# Altium PCB PCB1.PcbDoc (part 1 of 2)
Units mil, origin at the board's own origin, x right, y up, seen from the top; angles counter-clockwise.
Board outline 2145 x 1950 mil, 2 copper layers (Top Layer, Bottom Layer); 45 components, 40 nets, 204 pads, 256 vias.
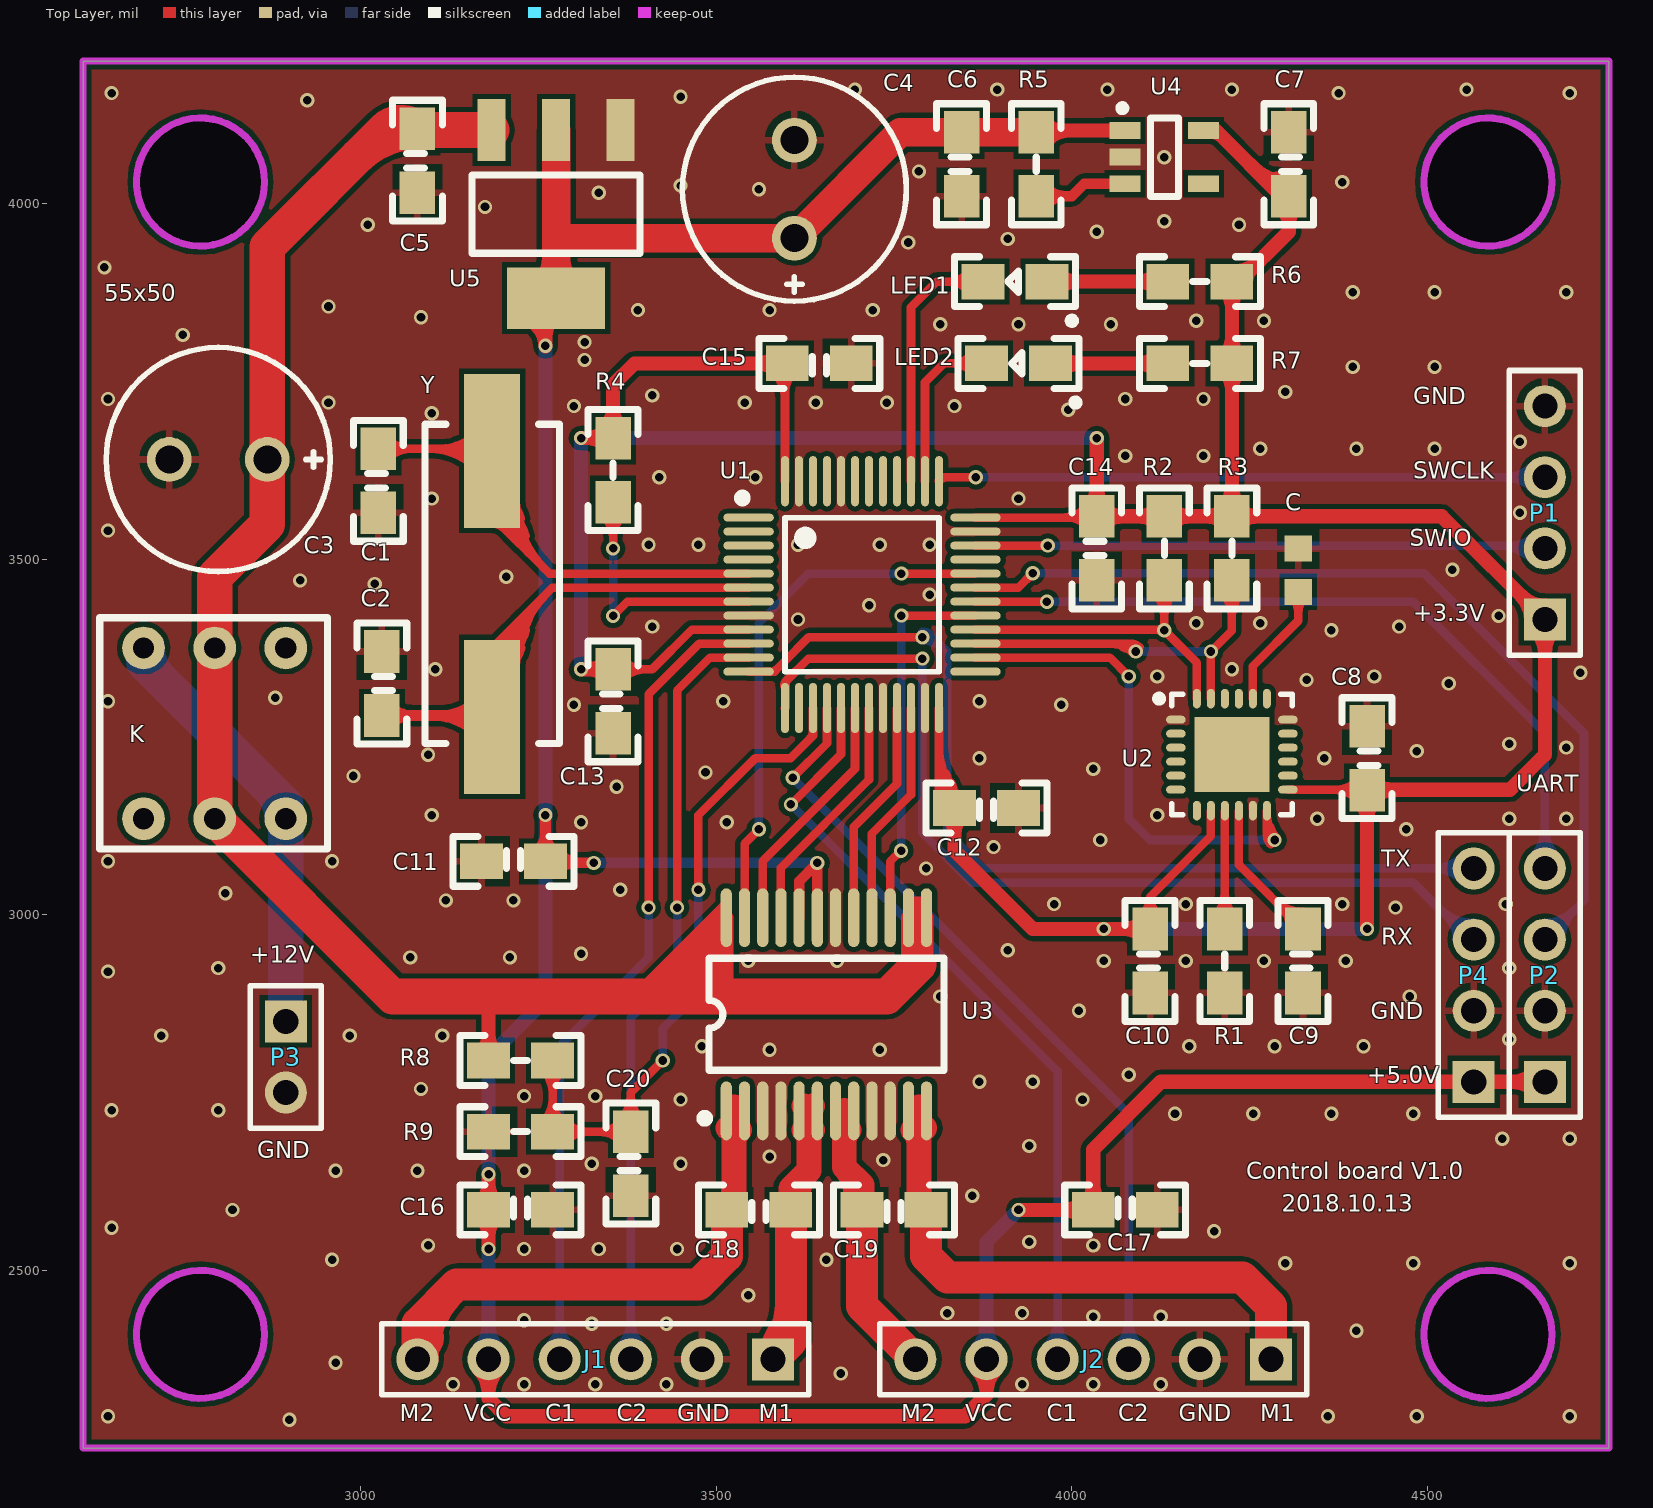
[diagram p0: Top Layer view]
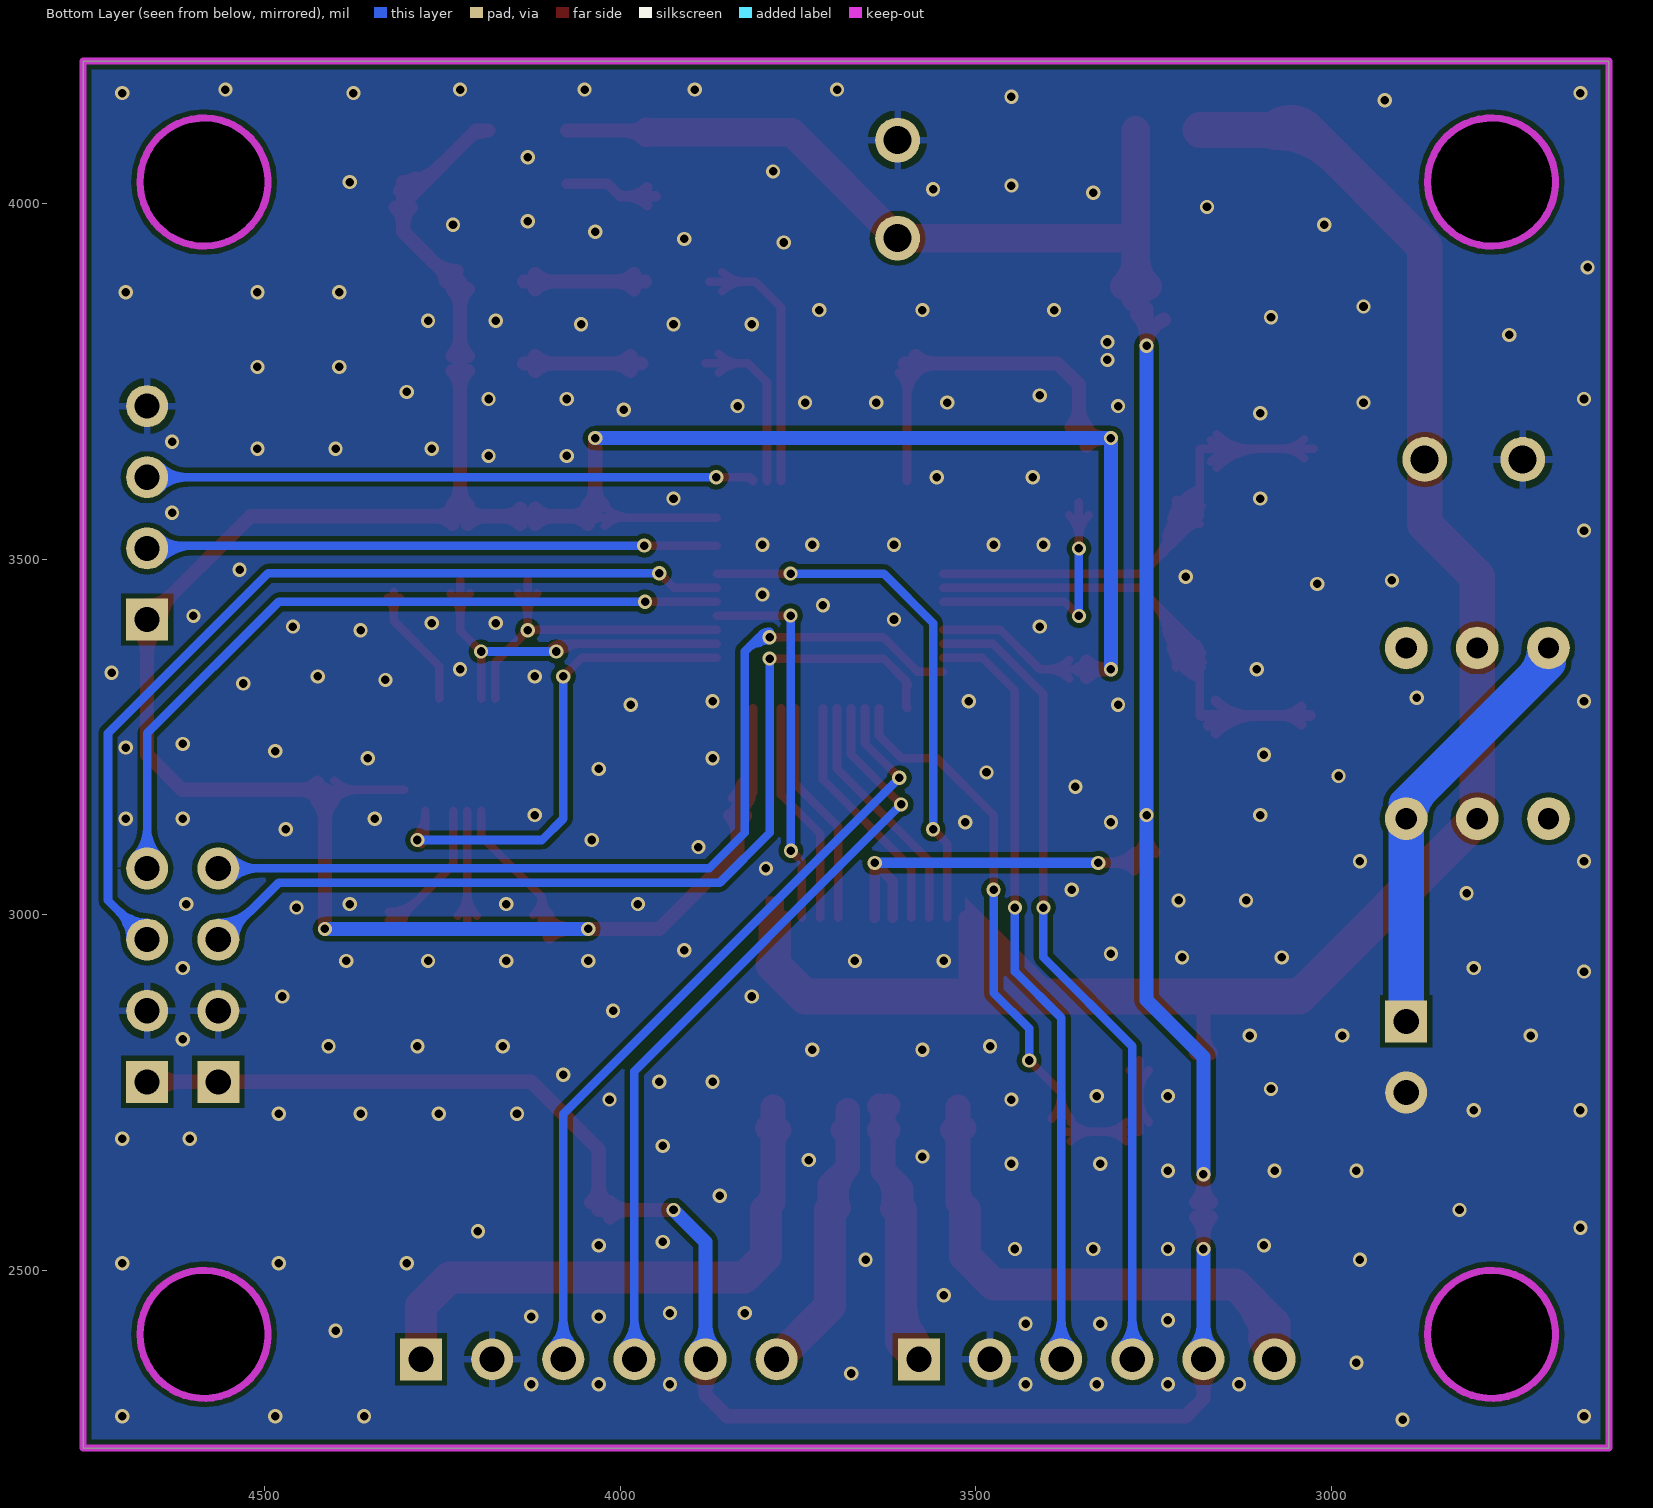
[diagram p1: Bottom Layer view, seen from below]

## Layer stack, top to bottom
Top Layer: signal copper 1.4
Dielectric: dielectric 12.6, FR-4, Dk 4.8
Bottom Layer: signal copper 1.4

## Board outline
2610,2250 2610,4200 4755,4200 4755,2250
cut-out: 4495,4030 ccw(c4585,4030) 4585,3940 ccw(c4585,4030) 4675,4030 ccw(c4585,4030) 4585,4120 ccw(c4585,4030)
cut-out: 2775,3940 cw(c2775,4030) 2685,4030 cw(c2775,4030) 2775,4120 cw(c2775,4030) 2865,4030 cw(c2775,4030)
cut-out: 2685,2410 ccw(c2775,2410) 2775,2320 ccw(c2775,2410) 2865,2410 ccw(c2775,2410) 2775,2500 ccw(c2775,2410)
cut-out: 4495,2410 ccw(c4585,2410) 4585,2320 ccw(c4585,2410) 4675,2410 ccw(c4585,2410) 4585,2500 ccw(c4585,2410)

## Design rules (kind name [scope] priority, off if disabled: settings)
Clearance [All] p1: gap=7
PlaneClearance [All] p1: clearance=40
PolygonConnect PolygonConnect_1 [IsVia] p1: connectstyle=Direct reliefconductorwidth=10 reliefentries=4 polygonreliefangle="90 Angle" airgapwidth=10
PolygonConnect [InComponent('U1','U2','U3','U4','U5','P3')] p2: connectstyle=Direct reliefconductorwidth=10 reliefentries=4 polygonreliefangle="90 Angle" airgapwidth=10
PolygonConnect PolygonConnect_2 [All] p3: connectstyle=Relief reliefconductorwidth=10 reliefentries=4 polygonreliefangle="90 Angle" airgapwidth=10
RoutingVias [All] p1: holewidth=28 width=50 viastyle="Through Hole" minholewidth=28 minwidth=50 maxholewidth=28 maxwidth=50
SolderMaskExpansion [All] p1: expansion=4
Width [All] p1: maxlimit=50 minlimit=12 preferedwidth=20 minimp=50.000000 maximp=50.000000 favimp=50.000000
27 further rules are at their usual default settings.

## Components (designator, comment, footprint, x,y, rotation, side; value= is the part's Value field where it differs from the comment)
C "2.2nf" 0603 4320,3485 r90 top
C1 "8.2pf" 0805-C 3025,3655 r270 top
C2 "8.2pf" 0805-C 3030,3280 r90 top
C3 "100U/50V" RB_D8_d3.5 2800,3640 r0 top
C4 "100U/50V" RB_D8_d3.5 3610,4020 r270 top
C5 "104" 0805-C 3080,4105 r270 top
C6 "104" 0805-C 3845,4100 r270 top
C7 "104" 0805-C 4305,4010 r90 top
C8 "104" 0805-C 4415,3175 r90 top
C9 "104" 0805-C 4325,2980 r270 top
C10 "104" 0805-C 4110,2980 r270 top
C11 "104" 0805-C 3260,3075 r180 top
C12 "104" 0805-C 3835,3150 r0 top
C13 "104" 0805-C 3355,3345 r270 top
C14 "104" 0805-C 4035,3560 r270 top
C15 "104" 0805-C 3600,3775 r0 top
C16 "104" 0805-C 3270,2585 r180 top
C17 "104" 0805-C 4120,2585 r180 top
C18 "104" 0805-C 3515,2585 r0 top
C19 "104" 0805-C 3705,2585 r0 top
C20 "104" 0805-C 3380,2695 r270 top
J1 "Header 6" HDR1X6 3580,2375 r180 top
J2 "Header 6" HDR1X6 4280,2375 r180 top
K "AN8*8" DIP-AN88 2795,3255 r270 top
LED1 "LED" LED-0805 3965,3890 r180 top
LED2 "LED" LED-0805 3970,3775 r180 top
P1 "HEADER4" HDR1X4 4665,3415 r90 top
P2 "HEADER4" HDR1X4 4665,2765 r90 top
P3 "Header2" HDR1X2 2895,2850 r270 top
P4 "HEADER4" HDR1X4 4565,2765 r90 top
R1 "10K" 0805-R 4215,2890 r90 top
R2 "10K" 0805-R 4130,3470 r90 top
R3 "10K" 0805-R 4225,3470 r90 top
R4 "10K" 0805-R 3355,3670 r270 top
R5 "10K" 0805-R 3950,4010 r90 top
R6 "100" 0805-R 4135,3890 r0 top
R7 "100" 0805-R 4135,3775 r0 top
R8 "100" 0805-R 3270,2795 r180 top
R9 "100" 0805-R 3180,2695 r0 top
U1 "STM32F103C8T6" LQFP-48 3705,3450 r270 top
U2 "MPU6050" QFN-24 4225,3225 r270 top
U3 "TB6612" SSOP-24 3655,2860 r0 top
U4 "RT9013" SOT-23-5 4130,4065 r180 top
U5 "AMS1117-5.0" SOT-223 3275,3985 r90 top
Y "8M" HC-49SMD 3185,3465 r90 top

## Footprints (in the part's own frame and the unit in brackets; to place one, negate y for a bottom-side part, rotate by r counter-clockwise, add the part's x,y. Pads: shape width x height; smd on the part's side, far side on the other; paste and mask are expansions set on the pad)
0603 [mm]
  rect 0.93x0.98 smd: 1(-0.789,0.042) 2(0.751,0.042)
0805-C [mil]
  rect 60x50 smd: 1(0,0) 2(90,0)
  silkscreen extent -40,-35 130,35
0805-R [mil]
  rect 60x50 smd: 1(0,0) 2(90,0)
  silkscreen extent -40,-35 130,35
DIP-AN88 [mil]
  round 60 hole 30: 1(-120,100) 2(-120,0) 3(-120,-100) 4(120,-100) 5(120,0) 6(120,100)
  silkscreen extent -163,-162 163,158
HC-49SMD [mm]
  rect 5.5x2 smd: 1(-4.75,0) 2(4.75,0)
  silkscreen extent -5.7,-2.4 5.7,2.4, body extent -6.7,-2.46 6.7,2.44, height 4
HDR1X2 [mm]
  rect 1.5x1.5 hole 0.9: 1(0,0)
  round 1.5 hole 0.9: 2(2.54,0)
  silkscreen extent -1.27,-1.27 3.81,1.27
HDR1X4 [mm]
  rect 1.5x1.5 hole 0.9: 1(0,0)
  round 1.5 hole 0.9: 2(2.54,0) 3(5.08,0) 4(7.62,0)
  silkscreen extent -1.27,-1.27 8.89,1.27
HDR1X6 [mm]
  rect 1.5x1.5 hole 0.9: 1(0,0)
  round 1.5 hole 0.9: 2(2.54,0) 3(5.08,0) 4(7.62,0) 5(10.16,0) 6(12.7,0)
  silkscreen extent -1.27,-1.27 13.97,1.27
LED-0805 [mil]
  rect 60x50 smd: 1(0,0) 2(90,0)
  silkscreen extent -40,-35 130,60
LQFP-48 [mm]
  oval 0.28x1.8 smd mask+0.051: 1(-2.75,-4.05) 2(-2.25,-4.05) 3(-1.75,-4.05) 4(-1.25,-4.05) 5(-0.75,-4.05) 6(-0.25,-4.05) 7(0.25,-4.05) 8(0.75,-4.05) 9(1.25,-4.05) 10(1.75,-4.05) 11(2.25,-4.05) 12(2.75,-4.05) 25(2.75,4.05) 26(2.25,4.05) 27(1.75,4.05) 28(1.25,4.05) 29(0.75,4.05) 30(0.25,4.05) 31(-0.25,4.05) 32(-0.75,4.05) 33(-1.25,4.05) 34(-1.75,4.05) 35(-2.25,4.05) 36(-2.75,4.05)
  oval 1.8x0.28 smd mask+0.051: 13(4.05,-2.75) 14(4.05,-2.25) 15(4.05,-1.75) 16(4.05,-1.25) 17(4.05,-0.75) 18(4.05,-0.25) 19(4.05,0.25) 20(4.05,0.75) 21(4.05,1.25) 22(4.05,1.75) 23(4.05,2.25) 24(4.05,2.75) 37(-4.05,2.75) 38(-4.05,2.25) 39(-4.05,1.75) 40(-4.05,1.25) 41(-4.05,0.75) 42(-4.05,0.25) 43(-4.05,-0.25) 44(-4.05,-0.75) 45(-4.05,-1.25) 46(-4.05,-1.75) 47(-4.05,-2.25) 48(-4.05,-2.75)
  silkscreen extent -3.6,-4.42 2.75,2.75
QFN-24 [mm]
  rect 2.68x2.68 smd mask+0.051: 0(0,0)
  oval 0.28x0.7 smd mask+0.051: 1(-1.25,-2) 2(-0.75,-2) 3(-0.25,-2) 4(0.25,-2) 5(0.75,-2) 6(1.25,-2) 13(1.25,2) 14(0.75,2) 15(0.25,2) 16(-0.25,2) 17(-0.75,2) 18(-1.25,2)
  oval 0.7x0.28 smd mask+0.051: 7(2,-1.25) 8(2,-0.75) 9(2,-0.25) 10(2,0.25) 11(2,0.75) 12(2,1.25) 19(-2,1.25) 20(-2,0.75) 21(-2,0.25) 22(-2,-0.25) 23(-2,-0.75) 24(-2,-1.25)
  silkscreen extent -2.15,-2.72 2.15,2.15
RB_D8_d3.5 [mm]
  round 1.6 hole 1: 1(1.75,0) 2(-1.75,0)
  silkscreen extent -4,-4 4,4
SOT-23-5 [mm]
  rect 1.1x0.6 smd: 1(1.4,-0.95) 2(1.4,0) 3(1.4,0.95) 4(-1.4,0.95) 5(-1.4,-0.95)
  silkscreen extent -0.5,-1.87 1.62,1.4
SOT-223 [mm]
  rect 2.2x1 smd: 1(3,-2.3) 2(3,0) 3(3,2.3)
  rect 2.2x3.5 smd: 2(-3,0)
  silkscreen extent -1.4,-3 1.4,3, body extent -3.49,-3.24 3.49,3.24, height 1.64
SSOP-24 [mm]
  oval 0.4x2.1 smd mask+0.051: 1(-3.575,-3.45) 2(-2.925,-3.45) 3(-2.275,-3.45) 4(-1.625,-3.45) 5(-0.975,-3.45) 6(-0.325,-3.45) 7(0.325,-3.45) 8(0.975,-3.45) 9(1.625,-3.45) 10(2.275,-3.45) 11(2.925,-3.45) 12(3.575,-3.45) 13(3.575,3.45) 14(2.925,3.45) 15(2.275,3.45) 16(1.625,3.45) 17(0.975,3.45) 18(0.325,3.45) 19(-0.325,3.45) 20(-0.975,3.45) 21(-1.625,3.45) 22(-2.275,3.45) 23(-2.925,3.45) 24(-3.575,3.45)
  silkscreen extent -4.5,-3.86 4.2,2

## Part data
C5 C6 C7 C8 C9 C10 C11 C12 C13 C14 C15 C16 C17 C18 C19 C20: library part 8.2pf
J1 J2: "Header, 6-Pin"
R1 R2 R3 R4 R5 R6 R7 R8 R9: library part 10K-0805
Y: library part "晶振 8M"

## Via types
v1: diameter 20, hole 12, Top Layer to Bottom Layer, 256 vias

## Nets (pads, with @x,y where several pads share a name; then routed paths per layer and width w, separated by ;. In a path a pad name is that pad's centre, name@x,y a point inside that pad or via, vN(x,y) a via of type N, cw(c..) or ccw(c..) an arc to the next point about the centre after c; other vN are vias at no path point)
3.3V: C7.1 C8.1 C10.1 C12.1 C13.1 C14.1 C15.1 P1.1 R2.2 R3.2 R4.1 R6.2 R7.2 U1.9 U1.24 U1.36 U1.48 U2.8 U2.13 U4.5 | length 13420.1
  Top Layer w12: C13.1@3355,3345 3410,3345 3465.79,3400.79 U1.9@3545.55,3400.79 ; U1.48@3596.73,3609.45 C15.1@3596.73,3771.73 ; U1.24@3813.27,3290.55 3813.27,3171.73 C12.1@3835,3150 ; U1.36@3864.45,3558.27 C14.1@4035,3558.27 ; C10.1@4110,2980 4110,3025 ; U2.8@4195.47,3146.26 4195.47,3110.47 4110,3025 ; U2.13@4303.74,3175.79 C8.1@4414.21,3175.79 ; C13.1@3368.44,3331.56 cw(c3400.87,3299.13) 3400.87,3345 ; C13.1@3368.44,3331.56 cw(c3400.87,3299.13) 3400.87,3345 ; C13.1@3368.44,3331.56 cw(c3400.87,3299.13) 3400.87,3345 ; C13.1@3368.44,3331.56 cw(c3400.87,3299.13) 3400.87,3345 ; C13.1@3368.44,3358.44 ccw(c3400.87,3390.87) 3400.87,3345 ; C13.1@3368.44,3358.44 ccw(c3400.87,3390.87) 3400.87,3345 ; C13.1@3368.44,3358.44 ccw(c3400.87,3390.87) 3400.87,3345 ; C13.1@3368.44,3358.44 ccw(c3400.87,3390.87) 3400.87,3345 ; C15.1@3581.56,3761.56 cw(c3544.95,3724.95) 3596.73,3724.95 ; C15.1@3581.56,3761.56 cw(c3544.95,3724.95) 3596.73,3724.95 ; C15.1@3581.56,3761.56 cw(c3544.95,3724.95) 3596.73,3724.95 ; C15.1@3581.56,3761.56 cw(c3544.95,3724.95) 3596.73,3724.95 ; 3596.73,3733.31 cw(c3636.69,3733.31) C15.1@3608.44,3761.56 ; 3596.73,3733.31 cw(c3636.69,3733.31) C15.1@3608.44,3761.56 ; 3596.73,3733.31 cw(c3636.69,3733.31) C15.1@3608.44,3761.56 ; 3596.73,3733.31 cw(c3636.69,3733.31) C15.1@3608.44,3761.56 ; 3813.27,3178.32 ccw(c3858.32,3178.32) C12.1@3826.46,3146.46 ; 3813.27,3178.32 ccw(c3858.32,3178.32) C12.1@3826.46,3146.46 ; 3813.27,3178.32 ccw(c3858.32,3178.32) C12.1@3826.46,3146.46 ; 3813.27,3178.32 ccw(c3858.32,3178.32) C12.1@3826.46,3146.46 ; 3813.27,3207.29 ccw(c3887.29,3207.29) C12.1@3834.95,3154.95 ; 3813.27,3207.29 ccw(c3887.29,3207.29) C12.1@3834.95,3154.95 ; 3813.27,3207.29 ccw(c3887.29,3207.29) C12.1@3834.95,3154.95 ; 3813.27,3207.29 ccw(c3887.29,3207.29) C12.1@3834.95,3154.95 ; 3813.27,3236.27 ccw(c3916.27,3236.27) C12.1@3843.44,3163.44 ; 3813.27,3236.27 ccw(c3916.27,3236.27) C12.1@3843.44,3163.44 ; 3813.27,3236.27 ccw(c3916.27,3236.27) C12.1@3843.44,3163.44 ; 3813.27,3236.27 ccw(c3916.27,3236.27) C12.1@3843.44,3163.44 ; C12.1@3815.62,3162.42 ccw(c3800.98,3175.08) 3817.74,3184.75 ; C12.1@3815.62,3162.42 ccw(c3800.98,3175.08) 3817.74,3184.75 ; C12.1@3815.62,3162.42 ccw(c3800.98,3175.08) 3817.74,3184.75 ; C12.1@3815.62,3162.42 ccw(c3800.98,3175.08) 3817.74,3184.75 ; C12.1@3815.62,3162.42 ccw(c3800.98,3175.08) 3817.74,3184.75 ; C12.1@3815.62,3162.42 ccw(c3800.98,3175.08) 3817.74,3184.75 ; C12.1@3817.24,3164.08 ccw(c3798.55,3184.69) 3822.5,3198.85 ; C12.1@3817.24,3164.08 ccw(c3798.55,3184.69) 3822.5,3198.85 ; C12.1@3817.24,3164.08 ccw(c3798.55,3184.69) 3822.5,3198.85 ; C12.1@3817.24,3164.08 ccw(c3798.55,3184.69) 3822.5,3198.85 ; C12.1@3817.24,3164.08 ccw(c3798.55,3184.69) 3822.5,3198.85 ; C12.1@3817.24,3164.08 ccw(c3798.55,3184.69) 3822.5,3198.85 ; 3821.08,3178.97 ccw(c3840.81,3190.36) C12.1@3834.92,3168.35 ; 3821.08,3178.97 ccw(c3840.81,3190.36) C12.1@3834.92,3168.35 ; 3821.08,3178.97 ccw(c3840.81,3190.36) C12.1@3834.92,3168.35 ; 3821.08,3178.97 ccw(c3840.81,3190.36) C12.1@3834.92,3168.35 ; 3821.08,3178.97 ccw(c3840.81,3190.36) C12.1@3834.92,3168.35 ; 3821.08,3178.97 ccw(c3840.81,3190.36) C12.1@3834.92,3168.35 ; C12.1@3825.3,3155.19 ccw(c3808.64,3173.56) 3829.99,3186.18 ; C12.1@3825.3,3155.19 ccw(c3808.64,3173.56) 3829.99,3186.18 ; C12.1@3825.3,3155.19 ccw(c3808.64,3173.56) 3829.99,3186.18 ; C12.1@3825.3,3155.19 ccw(c3808.64,3173.56) 3829.99,3186.18 ; C12.1@3825.3,3155.19 ccw(c3808.64,3173.56) 3829.99,3186.18 ; C12.1@3825.3,3155.19 ccw(c3808.64,3173.56) 3829.99,3186.18 ; 3984.95,3558.27 ccw(c3984.95,3610.05) C14.1@4021.56,3573.44 ; 3984.95,3558.27 ccw(c3984.95,3610.05) C14.1@4021.56,3573.44 ; 3984.95,3558.27 ccw(c3984.95,3610.05) C14.1@4021.56,3573.44 ; 3984.95,3558.27 ccw(c3984.95,3610.05) C14.1@4021.56,3573.44 ; 3993.31,3558.27 cw(c3993.31,3518.31) C14.1@4021.56,3546.56 ; 3993.31,3558.27 cw(c3993.31,3518.31) C14.1@4021.56,3546.56 ; 3993.31,3558.27 cw(c3993.31,3518.31) C14.1@4021.56,3546.56 ; 3993.31,3558.27 cw(c3993.31,3518.31) C14.1@4021.56,3546.56 ; C10.1@4098,2999.73 ccw(c4077.4,3025) 4110,3025 ; C10.1@4098,2999.73 ccw(c4077.4,3025) 4110,3025 ; C10.1@4098,2999.73 ccw(c4077.4,3025) 4110,3025 ; C10.1@4098,2999.73 ccw(c4077.4,3025) 4110,3025 ; 4110,3025 ccw(c4142.6,3025) C10.1@4122,2999.73 ; 4110,3025 ccw(c4142.6,3025) C10.1@4122,2999.73 ; 4110,3025 ccw(c4142.6,3025) C10.1@4122,2999.73 ; 4110,3025 ccw(c4142.6,3025) C10.1@4122,2999.73 ; 4367.23,3175.79 cw(c4367.23,3127.23) C8.1@4401.56,3161.56 ; 4367.23,3175.79 cw(c4367.23,3127.23) C8.1@4401.56,3161.56 ; 4367.23,3175.79 cw(c4367.23,3127.23) C8.1@4401.56,3161.56 ; 4367.23,3175.79 cw(c4367.23,3127.23) C8.1@4401.56,3161.56 ; 4371.03,3175.79 ccw(c4371.03,3218.97) C8.1@4401.56,3188.44 ; 4371.03,3175.79 ccw(c4371.03,3218.97) C8.1@4401.56,3188.44 ; 4371.03,3175.79 ccw(c4371.03,3218.97) C8.1@4401.56,3188.44 ; 4371.03,3175.79 ccw(c4371.03,3218.97) C8.1@4401.56,3188.44
  Top Layer w20: v1(3310,3345) C13.1@3355,3345 ; v1(3310,3670) R4.1@3355,3670 3355,3745 3385,3775 C15.1@3596.73,3775 ; C15.1@3596.73,3771.73 C15.1@3596.73,3775 ; C15.1@3600,3775 C15.1@3596.73,3775 ; C12.1@3835,3150 3835,3090 3945,2980 v1(4045,2980) C10.1@4110,2980 ; v1(4035,3670) C14.1@4035,3560 R2.2@4130,3560 R3.2@4225,3560 ; U4.5@4185.12,4102.4 4202.6,4102.4 C7.1@4295,4010 ; C7.1@4305,4010 4305,3960 4235,3890 R6.2@4225,3890 R7.2@4225,3775 R3.2@4225,3560 ; C8.1@4414.21,3175.79 4615.79,3175.79 4665,3225 P1.1@4665,3415 4520,3560 R3.2@4225,3560 ; v1(4415,2980) C8.1@4415,3175 ; v1@3318.79,3345 cw(c3318.79,3308.79) C13.1@3344.39,3334.39 ; v1@3318.79,3345 ccw(c3318.79,3381.21) C13.1@3344.39,3355.61 ; v1@3318.79,3345 cw(c3318.79,3308.79) C13.1@3344.39,3334.39 ; v1@3318.79,3345 ccw(c3318.79,3381.21) C13.1@3344.39,3355.61 ; v1@3318.79,3345 cw(c3318.79,3308.79) C13.1@3344.39,3334.39 ; v1@3318.79,3345 ccw(c3318.79,3381.21) C13.1@3344.39,3355.61 ; v1@3318.79,3345 cw(c3318.79,3308.79) C13.1@3344.39,3334.39 ; v1@3318.79,3345 ccw(c3318.79,3381.21) C13.1@3344.39,3355.61 ; v1@3318.79,3670 cw(c3318.79,3633.79) R4.1@3344.39,3659.39 ; v1@3318.79,3670 ccw(c3318.79,3706.21) R4.1@3344.39,3680.61 ; v1@3318.79,3670 cw(c3318.79,3633.79) R4.1@3344.39,3659.39 ; v1@3318.79,3670 ccw(c3318.79,3706.21) R4.1@3344.39,3680.61 ; v1@3318.79,3670 cw(c3318.79,3633.79) R4.1@3344.39,3659.39 ; v1@3318.79,3670 ccw(c3318.79,3706.21) R4.1@3344.39,3680.61 ; v1@3318.79,3670 cw(c3318.79,3633.79) R4.1@3344.39,3659.39 ; v1@3318.79,3670 ccw(c3318.79,3706.21) R4.1@3344.39,3680.61 ; R4.1@3344.39,3685.61 ccw(c3318.79,3711.21) 3355,3711.21 ; R4.1@3344.39,3685.61 ccw(c3318.79,3711.21) 3355,3711.21 ; R4.1@3344.39,3685.61 ccw(c3318.79,3711.21) 3355,3711.21 ; R4.1@3344.39,3685.61 ccw(c3318.79,3711.21) 3355,3711.21 ; 3355,3711.21 ccw(c3391.21,3711.21) R4.1@3365.61,3685.61 ; 3355,3711.21 ccw(c3391.21,3711.21) R4.1@3365.61,3685.61 ; 3355,3711.21 ccw(c3391.21,3711.21) R4.1@3365.61,3685.61 ; 3355,3711.21 ccw(c3391.21,3711.21) R4.1@3365.61,3685.61 ; 3558.79,3775 cw(c3558.79,3738.79) C15.1@3584.39,3764.39 ; 3558.79,3775 ccw(c3558.79,3811.21) C15.1@3584.39,3785.61 ; 3558.79,3775 cw(c3558.79,3738.79) C15.1@3584.39,3764.39 ; 3558.79,3775 ccw(c3558.79,3811.21) C15.1@3584.39,3785.61 ; 3558.79,3775 cw(c3558.79,3738.79) C15.1@3584.39,3764.39 ; 3558.79,3775 ccw(c3558.79,3811.21) C15.1@3584.39,3785.61 ; 3558.79,3775 cw(c3558.79,3738.79) C15.1@3584.39,3764.39 ; 3558.79,3775 ccw(c3558.79,3811.21) C15.1@3584.39,3785.61 ; C12.1@3824.39,3139.39 cw(c3798.79,3113.79) 3835,3113.79 ; C12.1@3824.39,3139.39 cw(c3798.79,3113.79) 3835,3113.79 ; C12.1@3824.39,3139.39 cw(c3798.79,3113.79) 3835,3113.79 ; C12.1@3824.39,3139.39 cw(c3798.79,3113.79) 3835,3113.79 ; 3835,3113.79 cw(c3871.21,3113.79) C12.1@3845.61,3139.39 ; 3835,3113.79 cw(c3871.21,3113.79) C12.1@3845.61,3139.39 ; 3835,3113.79 cw(c3871.21,3113.79) C12.1@3845.61,3139.39 ; 3835,3113.79 cw(c3871.21,3113.79) C12.1@3845.61,3139.39 ; C14.1@4024.39,3575.61 ccw(c3998.79,3601.21) 4035,3601.21 ; C14.1@4024.39,3575.61 ccw(c3998.79,3601.21) 4035,3601.21 ; C14.1@4024.39,3575.61 ccw(c3998.79,3601.21) 4035,3601.21 ; C14.1@4024.39,3575.61 ccw(c3998.79,3601.21) 4035,3601.21 ; 4035,3601.21 ccw(c4071.21,3601.21) C14.1@4045.61,3575.61 ; 4035,3601.21 ccw(c4071.21,3601.21) C14.1@4045.61,3575.61 ; 4035,3601.21 ccw(c4071.21,3601.21) C14.1@4045.61,3575.61 ; 4035,3601.21 ccw(c4071.21,3601.21) C14.1@4045.61,3575.61 ; C14.1@4045.61,3549.39 cw(c4071.21,3523.79) 4071.21,3560 ; C14.1@4045.61,3549.39 cw(c4071.21,3523.79) 4071.21,3560 ; C14.1@4045.61,3549.39 cw(c4071.21,3523.79) 4071.21,3560 ; C14.1@4045.61,3549.39 cw(c4071.21,3523.79) 4071.21,3560 ; C14.1@4045.61,3570.61 ccw(c4071.21,3596.21) 4071.21,3560 ; C14.1@4045.61,3570.61 ccw(c4071.21,3596.21) 4071.21,3560 ; C14.1@4045.61,3570.61 ccw(c4071.21,3596.21) 4071.21,3560 ; C14.1@4045.61,3570.61 ccw(c4071.21,3596.21) 4071.21,3560 ; 4073.79,2980 cw(c4073.79,2943.79) C10.1@4099.39,2969.39 ; 4073.79,2980 ccw(c4073.79,3016.21) C10.1@4099.39,2990.61 ; 4073.79,2980 cw(c4073.79,2943.79) C10.1@4099.39,2969.39 ; 4073.79,2980 ccw(c4073.79,3016.21) C10.1@4099.39,2990.61 ; 4073.79,2980 cw(c4073.79,2943.79) C10.1@4099.39,2969.39 ; 4073.79,2980 ccw(c4073.79,3016.21) C10.1@4099.39,2990.61 ; 4073.79,2980 cw(c4073.79,2943.79) C10.1@4099.39,2969.39 ; 4073.79,2980 ccw(c4073.79,3016.21) C10.1@4099.39,2990.61 ; 4093.79,3560 cw(c4093.79,3523.79) R2.2@4119.39,3549.39 ; 4093.79,3560 ccw(c4093.79,3596.21) R2.2@4119.39,3570.61 ; 4093.79,3560 cw(c4093.79,3523.79) R2.2@4119.39,3549.39 ; 4093.79,3560 ccw(c4093.79,3596.21) R2.2@4119.39,3570.61 ; 4093.79,3560 cw(c4093.79,3523.79) R2.2@4119.39,3549.39 ; 4093.79,3560 ccw(c4093.79,3596.21) R2.2@4119.39,3570.61 ; 4093.79,3560 cw(c4093.79,3523.79) R2.2@4119.39,3549.39 ; 4093.79,3560 ccw(c4093.79,3596.21) R2.2@4119.39,3570.61 ; R2.2@4140.61,3549.39 cw(c4166.21,3523.79) 4166.21,3560 ; R2.2@4140.61,3549.39 cw(c4166.21,3523.79) 4166.21,3560 ; R2.2@4140.61,3549.39 cw(c4166.21,3523.79) 4166.21,3560 ; R2.2@4140.61,3549.39 cw(c4166.21,3523.79) 4166.21,3560 ; R2.2@4140.61,3570.61 ccw(c4166.21,3596.21) 4166.21,3560 ; R2.2@4140.61,3570.61 ccw(c4166.21,3596.21) 4166.21,3560 ; R2.2@4140.61,3570.61 ccw(c4166.21,3596.21) 4166.21,3560 ; R2.2@4140.61,3570.61 ccw(c4166.21,3596.21) 4166.21,3560 ; 4188.79,3560 cw(c4188.79,3523.79) R3.2@4214.39,3549.39 ; 4188.79,3560 ccw(c4188.79,3596.21) R3.2@4214.39,3570.61 ; 4188.79,3560 cw(c4188.79,3523.79) R3.2@4214.39,3549.39 ; 4188.79,3560 ccw(c4188.79,3596.21) R3.2@4214.39,3570.61 ; 4188.79,3560 cw(c4188.79,3523.79) R3.2@4214.39,3549.39 ; 4188.79,3560 ccw(c4188.79,3596.21) R3.2@4214.39,3570.61 ; 4188.79,3560 cw(c4188.79,3523.79) R3.2@4214.39,3549.39 ; 4188.79,3560 ccw(c4188.79,3596.21) R3.2@4214.39,3570.61 ; U4.5@4194.96,4100.59 cw(c4194.96,4077.78) 4211.09,4093.91 ; U4.5@4194.96,4100.59 cw(c4194.96,4077.78) 4211.09,4093.91 ; U4.5@4194.96,4100.59 cw(c4194.96,4077.78) 4211.09,4093.91 ; U4.5@4194.96,4100.59 cw(c4194.96,4077.78) 4211.09,4093.91 ; R3.2@4214.39,3575.61 ccw(c4188.79,3601.21) 4225,3601.21 ; R3.2@4214.39,3575.61 ccw(c4188.79,3601.21) 4225,3601.21 ; R3.2@4214.39,3575.61 ccw(c4188.79,3601.21) 4225,3601.21 ; R3.2@4214.39,3575.61 ccw(c4188.79,3601.21) 4225,3601.21 ; R7.2@4214.39,3764.39 cw(c4188.79,3738.79) 4225,3738.79 ; R7.2@4214.39,3764.39 cw(c4188.79,3738.79) 4225,3738.79 ; R7.2@4214.39,3764.39 cw(c4188.79,3738.79) 4225,3738.79 ; R7.2@4214.39,3785.61 ccw(c4188.79,3811.21) 4225,3811.21 ; R7.2@4214.39,3785.61 ccw(c4188.79,3811.21) 4225,3811.21 ; R7.2@4214.39,3785.61 ccw(c4188.79,3811.21) 4225,3811.21 ; R6.2@4214.39,3879.39 cw(c4188.79,3853.79) 4225,3853.79 ; R6.2@4214.39,3879.39 cw(c4188.79,3853.79) 4225,3853.79 ; R6.2@4214.39,3879.39 cw(c4188.79,3853.79) 4225,3853.79 ; 4225,3601.21 ccw(c4261.21,3601.21) R3.2@4235.61,3575.61 ; 4225,3601.21 ccw(c4261.21,3601.21) R3.2@4235.61,3575.61 ; 4225,3601.21 ccw(c4261.21,3601.21) R3.2@4235.61,3575.61 ; 4225,3601.21 ccw(c4261.21,3601.21) R3.2@4235.61,3575.61 ; 4225,3738.79 cw(c4261.21,3738.79) R7.2@4235.61,3764.39 ; 4225,3738.79 cw(c4261.21,3738.79) R7.2@4235.61,3764.39 ; 4225,3738.79 cw(c4261.21,3738.79) R7.2@4235.61,3764.39 ; 4225,3811.21 ccw(c4261.21,3811.21) R7.2@4235.61,3785.61 ; 4225,3811.21 ccw(c4261.21,3811.21) R7.2@4235.61,3785.61 ; 4225,3811.21 ccw(c4261.21,3811.21) R7.2@4235.61,3785.61 ; 4225,3853.79 cw(c4261.21,3853.79) R6.2@4235.61,3879.39 ; 4225,3853.79 cw(c4261.21,3853.79) R6.2@4235.61,3879.39 ; 4225,3853.79 cw(c4261.21,3853.79) R6.2@4235.61,3879.39 ; R6.2@4230,3905 ccw(c4230,3953.28) 4264.14,3919.14 ; R6.2@4230,3905 ccw(c4230,3953.28) 4264.14,3919.14 ; R6.2@4230,3905 ccw(c4230,3953.28) 4264.14,3919.14 ; R3.2@4235.61,3549.39 cw(c4261.21,3523.79) 4261.21,3560 ; R3.2@4235.61,3549.39 cw(c4261.21,3523.79) 4261.21,3560 ; R3.2@4235.61,3549.39 cw(c4261.21,3523.79) 4261.21,3560 ; R3.2@4235.61,3549.39 cw(c4261.21,3523.79) 4261.21,3560 ; R3.2@4235.61,3570.61 ccw(c4261.21,3596.21) 4261.21,3560 ; R3.2@4235.61,3570.61 ccw(c4261.21,3596.21) 4261.21,3560 ; R3.2@4235.61,3570.61 ccw(c4261.21,3596.21) 4261.21,3560 ; R3.2@4235.61,3570.61 ccw(c4261.21,3596.21) 4261.21,3560 ; R6.2@4245,3890 cw(c4269.14,3890) R6.2@4252.07,3907.07 ; R6.2@4245,3890 cw(c4269.14,3890) R6.2@4252.07,3907.07 ; R6.2@4245,3890 cw(c4269.14,3890) R6.2@4252.07,3907.07 ; 4253.79,4051.21 ccw(c4305,4102.43) C7.1@4305,4030 ; 4253.79,4051.21 ccw(c4305,4102.43) C7.1@4305,4030 ; 4253.79,4051.21 ccw(c4305,4102.43) C7.1@4305,4030 ; 4253.79,4051.21 ccw(c4305,4102.43) C7.1@4305,4030 ; C7.1@4288.09,4034.53 cw(c4279.33,4001.84) C7.1@4309.45,4017.28 ; C7.1@4288.09,4034.53 cw(c4279.33,4001.84) C7.1@4309.45,4017.28 ; C7.1@4288.09,4034.53 cw(c4279.33,4001.84) C7.1@4309.45,4017.28 ; C7.1@4288.09,4034.53 cw(c4279.33,4001.84) C7.1@4309.45,4017.28 ; C7.1@4288.09,4034.53 cw(c4279.33,4001.84) C7.1@4309.45,4017.28 ; C7.1@4288.09,4034.53 cw(c4279.33,4001.84) C7.1@4309.45,4017.28 ; C7.1@4294.39,3994.39 cw(c4268.79,3968.79) 4305,3968.79 ; C7.1@4294.39,3994.39 cw(c4268.79,3968.79) 4305,3968.79 ; C7.1@4294.39,3994.39 cw(c4268.79,3968.79) 4305,3968.79 ; 4305,3968.79 cw(c4341.21,3968.79) C7.1@4315.61,3994.39 ; 4305,3968.79 cw(c4341.21,3968.79) C7.1@4315.61,3994.39 ; 4305,3968.79 cw(c4341.21,3968.79) C7.1@4315.61,3994.39 ; C8.1@4404.39,3159.39 cw(c4378.79,3133.79) 4415,3133.79 ; C8.1@4404.39,3159.39 cw(c4378.79,3133.79) 4415,3133.79 ; C8.1@4404.39,3159.39 cw(c4378.79,3133.79) 4415,3133.79 ; C8.1@4404.39,3159.39 cw(c4378.79,3133.79) 4415,3133.79 ; 4415,3133.79 cw(c4451.21,3133.79) C8.1@4425.61,3159.39 ; 4415,3133.79 cw(c4451.21,3133.79) C8.1@4425.61,3159.39 ; 4415,3133.79 cw(c4451.21,3133.79) C8.1@4425.61,3159.39 ; 4415,3133.79 cw(c4451.21,3133.79) C8.1@4425.61,3159.39 ; C8.1@4425.61,3164.39 cw(c4453.11,3136.89) 4453.11,3175.79 ; C8.1@4425.61,3164.39 cw(c4453.11,3136.89) 4453.11,3175.79 ; C8.1@4425.61,3164.39 cw(c4453.11,3136.89) 4453.11,3175.79 ; C8.1@4425.61,3164.39 cw(c4453.11,3136.89) 4453.11,3175.79 ; C8.1@4425.61,3185.61 ccw(c4449.31,3209.31) 4449.31,3175.79 ; C8.1@4425.61,3185.61 ccw(c4449.31,3209.31) 4449.31,3175.79 ; C8.1@4425.61,3185.61 ccw(c4449.31,3209.31) 4449.31,3175.79 ; C8.1@4425.61,3185.61 ccw(c4449.31,3209.31) 4449.31,3175.79 ; 4631.66,3448.34 cw(c4598.33,3415) P1.1@4645.47,3415 ; 4631.66,3448.34 ccw(c4665,3481.67) P1.1@4665,3434.53 ; 4631.66,3448.34 cw(c4598.33,3415) P1.1@4645.47,3415 ; 4631.66,3448.34 ccw(c4665,3481.67) P1.1@4665,3434.53 ; 4631.66,3448.34 cw(c4598.33,3415) P1.1@4645.47,3415 ; 4631.66,3448.34 ccw(c4665,3481.67) P1.1@4665,3434.53 ; 4631.66,3448.34 cw(c4598.33,3415) P1.1@4645.47,3415 ; 4631.66,3448.34 ccw(c4665,3481.67) P1.1@4665,3434.53 ; P1.1@4651.19,3401.19 cw(c4617.86,3367.86) 4665,3367.86 ; P1.1@4651.19,3401.19 cw(c4617.86,3367.86) 4665,3367.86 ; P1.1@4651.19,3401.19 cw(c4617.86,3367.86) 4665,3367.86 ; P1.1@4651.19,3401.19 cw(c4617.86,3367.86) 4665,3367.86 ; 4665,3367.86 cw(c4712.14,3367.86) P1.1@4678.81,3401.19 ; 4665,3367.86 cw(c4712.14,3367.86) P1.1@4678.81,3401.19 ; 4665,3367.86 cw(c4712.14,3367.86) P1.1@4678.81,3401.19 ; 4665,3367.86 cw(c4712.14,3367.86) P1.1@4678.81,3401.19
  Bottom Layer w20: v1(3310,3345) v1(3310,3670) v1(4035,3670) ; v1(4045,2980) v1(4415,2980)
5.0V: C4.1 C6.1 C11.1 C16.2 C17.2 J1.5 J2.5 P2.1 P4.1 R5.2 U3.19 U3.20 U4.1 U5.2 | length 8966
  Top Layer w15: C11.1@3260,3075 v1(3260,3140) ; C11.1@3262.2,3072.8 v1(3327.8,3072.8) ; U3.20@3616.61,2995.83 3616.61,3047.2 v1(3642.2,3072.8) U3.19@3642.2,2995.83 ; C11.1@3247.63,3087.37 ccw(c3217.75,3117.25) 3260,3117.25 ; C11.1@3247.63,3087.37 ccw(c3217.75,3117.25) 3260,3117.25 ; C11.1@3247.63,3087.37 ccw(c3217.75,3117.25) 3260,3117.25 ; C11.1@3247.63,3087.37 ccw(c3217.75,3117.25) 3260,3117.25 ; 3260,3117.25 ccw(c3302.25,3117.25) C11.1@3272.37,3087.37 ; 3260,3117.25 ccw(c3302.25,3117.25) C11.1@3272.37,3087.37 ; 3260,3117.25 ccw(c3302.25,3117.25) C11.1@3272.37,3087.37 ; 3260,3117.25 ccw(c3302.25,3117.25) C11.1@3272.37,3087.37 ; C11.1@3277.37,3062.63 cw(c3301.93,3038.07) 3301.93,3072.8 ; C11.1@3277.37,3062.63 cw(c3301.93,3038.07) 3301.93,3072.8 ; C11.1@3277.37,3062.63 cw(c3301.93,3038.07) 3301.93,3072.8 ; C11.1@3277.37,3062.63 cw(c3301.93,3038.07) 3301.93,3072.8 ; C11.1@3277.37,3087.37 ccw(c3312.57,3122.57) 3312.57,3072.8 ; C11.1@3277.37,3087.37 ccw(c3312.57,3122.57) 3312.57,3072.8 ; C11.1@3277.37,3087.37 ccw(c3312.57,3122.57) 3312.57,3072.8 ; C11.1@3277.37,3087.37 ccw(c3312.57,3122.57) 3312.57,3072.8
  Top Layer w20: J1.5@3180,2375 3180,2320 3205,2295 3850,2295 3880,2325 J2.5@3880,2375 ; v1(3180,2530) C16.2@3180,2585 v1(3180,2635) ; v1(3260,3800) U5.2@3260,3851.89 ; v1(3925,2585) C17.2@4030,2585 4030,2670 4125,2765 P2.1@4665,2765 ; R5.2@3957.4,4102.4 U4.1@4074.88,4102.4 ; R5.2@3965.61,4089.39 cw(c3997.01,4057.99) 3997.01,4102.4 ; R5.2@3965.61,4110.61 ccw(c3985.42,4130.42) 3985.42,4102.4 ; J1.5@3166.19,2361.19 cw(c3132.86,2327.86) 3180,2327.86 ; J1.5@3166.19,2361.19 cw(c3132.86,2327.86) 3180,2327.86 ; J1.5@3166.19,2361.19 cw(c3132.86,2327.86) 3180,2327.86 ; J1.5@3166.19,2361.19 cw(c3132.86,2327.86) 3180,2327.86 ; C16.2@3169.39,2574.39 cw(c3143.79,2548.79) 3180,2548.79 ; C16.2@3169.39,2574.39 cw(c3143.79,2548.79) 3180,2548.79 ; C16.2@3169.39,2574.39 cw(c3143.79,2548.79) 3180,2548.79 ; C16.2@3169.39,2574.39 cw(c3143.79,2548.79) 3180,2548.79 ; C16.2@3169.39,2595.61 ccw(c3143.79,2621.21) 3180,2621.21 ; C16.2@3169.39,2595.61 ccw(c3143.79,2621.21) 3180,2621.21 ; C16.2@3169.39,2595.61 ccw(c3143.79,2621.21) 3180,2621.21 ; C16.2@3169.39,2595.61 ccw(c3143.79,2621.21) 3180,2621.21 ; 3180,2327.86 cw(c3227.14,2327.86) J1.5@3193.81,2361.19 ; 3180,2327.86 cw(c3227.14,2327.86) J1.5@3193.81,2361.19 ; 3180,2327.86 cw(c3227.14,2327.86) J1.5@3193.81,2361.19 ; 3180,2327.86 cw(c3227.14,2327.86) J1.5@3193.81,2361.19 ; 3180,2548.79 cw(c3216.21,2548.79) C16.2@3190.61,2574.39 ; 3180,2548.79 cw(c3216.21,2548.79) C16.2@3190.61,2574.39 ; 3180,2548.79 cw(c3216.21,2548.79) C16.2@3190.61,2574.39 ; 3180,2548.79 cw(c3216.21,2548.79) C16.2@3190.61,2574.39 ; 3180,2621.21 ccw(c3216.21,2621.21) C16.2@3190.61,2595.61 ; 3180,2621.21 ccw(c3216.21,2621.21) C16.2@3190.61,2595.61 ; 3180,2621.21 ccw(c3216.21,2621.21) C16.2@3190.61,2595.61 ; 3180,2621.21 ccw(c3216.21,2621.21) C16.2@3190.61,2595.61 ; U5.2@3235.81,3836.49 cw(c3219.12,3799.17) v1@3260,3799.17 ; U5.2@3235.81,3836.49 cw(c3219.12,3799.17) v1@3260,3799.17 ; U5.2@3235.81,3836.49 cw(c3219.12,3799.17) v1@3260,3799.17 ; U5.2@3235.81,3836.49 cw(c3219.12,3799.17) v1@3260,3799.17 ; 3260,3812.05 cw(c3304.25,3812.05) U5.2@3272.96,3843.34 ; 3260,3812.05 cw(c3304.25,3812.05) U5.2@3272.96,3843.34 ; 3260,3812.05 cw(c3304.25,3812.05) U5.2@3272.96,3843.34 ; 3260,3812.05 cw(c3304.25,3812.05) U5.2@3272.96,3843.34 ; J2.5@3866.19,2361.19 cw(c3832.86,2327.86) 3880,2327.86 ; J2.5@3866.19,2361.19 cw(c3832.86,2327.86) 3880,2327.86 ; J2.5@3866.19,2361.19 cw(c3832.86,2327.86) 3880,2327.86 ; J2.5@3866.19,2361.19 cw(c3832.86,2327.86) 3880,2327.86 ; 3880,2327.86 cw(c3927.14,2327.86) J2.5@3893.81,2361.19 ; 3880,2327.86 cw(c3927.14,2327.86) J2.5@3893.81,2361.19 ; 3880,2327.86 cw(c3927.14,2327.86) J2.5@3893.81,2361.19 ; 3880,2327.86 cw(c3927.14,2327.86) J2.5@3893.81,2361.19 ; R5.2@3960.61,4089.39 cw(c3992.01,4057.99) 3992.01,4102.4 ; R5.2@3960.61,4089.39 cw(c3992.01,4057.99) 3992.01,4102.4 ; R5.2@3960.61,4089.39 cw(c3992.01,4057.99) 3992.01,4102.4 ; R5.2@3960.61,4110.61 ccw(c3980.42,4130.42) 3980.42,4102.4 ; R5.2@3960.61,4110.61 ccw(c3980.42,4130.42) 3980.42,4102.4 ; R5.2@3960.61,4110.61 ccw(c3980.42,4130.42) 3980.42,4102.4 ; 3988.79,2585 cw(c3988.79,2548.79) C17.2@4014.39,2574.39 ; 3988.79,2585 ccw(c3988.79,2621.21) C17.2@4014.39,2595.61 ; 3988.79,2585 cw(c3988.79,2548.79) C17.2@4014.39,2574.39 ; 3988.79,2585 ccw(c3988.79,2621.21) C17.2@4014.39,2595.61 ; 3988.79,2585 cw(c3988.79,2548.79) C17.2@4014.39,2574.39 ; 3988.79,2585 ccw(c3988.79,2621.21) C17.2@4014.39,2595.61 ; 3988.79,2585 cw(c3988.79,2548.79) C17.2@4014.39,2574.39 ; 3988.79,2585 ccw(c3988.79,2621.21) C17.2@4014.39,2595.61 ; C17.2@4019.39,2595.61 ccw(c3993.79,2621.21) 4030,2621.21 ; C17.2@4019.39,2595.61 ccw(c3993.79,2621.21) 4030,2621.21 ; C17.2@4019.39,2595.61 ccw(c3993.79,2621.21) 4030,2621.21 ; C17.2@4019.39,2595.61 ccw(c3993.79,2621.21) 4030,2621.21 ; 4030,2621.21 ccw(c4066.21,2621.21) C17.2@4040.61,2595.61 ; 4030,2621.21 ccw(c4066.21,2621.21) C17.2@4040.61,2595.61 ; 4030,2621.21 ccw(c4066.21,2621.21) C17.2@4040.61,2595.61 ; 4030,2621.21 ccw(c4066.21,2621.21) C17.2@4040.61,2595.61 ; 4617.86,2765 cw(c4617.86,2717.86) P2.1@4651.19,2751.19 ; 4617.86,2765 ccw(c4617.86,2812.14) P2.1@4651.19,2778.81 ; 4617.86,2765 cw(c4617.86,2717.86) P2.1@4651.19,2751.19 ; 4617.86,2765 ccw(c4617.86,2812.14) P2.1@4651.19,2778.81 ; 4617.86,2765 cw(c4617.86,2717.86) P2.1@4651.19,2751.19 ; 4617.86,2765 ccw(c4617.86,2812.14) P2.1@4651.19,2778.81 ; 4617.86,2765 cw(c4617.86,2717.86) P2.1@4651.19,2751.19 ; 4617.86,2765 ccw(c4617.86,2812.14) P2.1@4651.19,2778.81
  Top Layer w40: U5.2@3275,3866.89 3275,3951.1 ; U5.2@3275,4103.11 3275,3951.1 ; R5.2@3955,4100 3758.9,4100 C4.1@3610,3951.1 3275,3951.1 ; U5.2@3258.52,3883.37 ccw(c3218.73,3923.16) 3275,3923.16 ; U5.2@3258.52,3883.37 ccw(c3218.73,3923.16) 3275,3923.16 ; U5.2@3258.52,3883.37 ccw(c3218.73,3923.16) 3275,3923.16 ; U5.2@3258.52,3883.37 ccw(c3218.73,3923.16) 3275,3923.16 ; 3275,3923.16 ccw(c3331.27,3923.16) U5.2@3291.48,3883.37 ; 3275,3923.16 ccw(c3331.27,3923.16) U5.2@3291.48,3883.37 ; 3275,3923.16 ccw(c3331.27,3923.16) U5.2@3291.48,3883.37 ; 3275,3923.16 ccw(c3331.27,3923.16) U5.2@3291.48,3883.37
  Bottom Layer w15: v1(3327.8,3072.8) v1(3642.2,3072.8)
  Bottom Layer w20: J1.5@3180,2375 v1(3180,2530) ; v1(3180,2635) 3180,2800 3260,2880 v1(3260,3140) v1(3260,3800) ; J2.5@3880,2375 3880,2540 v1(3925,2585) ; J1.5@3166.19,2388.81 ccw(c3132.86,2422.14) 3180,2422.14 ; J1.5@3166.19,2388.81 ccw(c3132.86,2422.14) 3180,2422.14 ; J1.5@3166.19,2388.81 ccw(c3132.86,2422.14) 3180,2422.14 ; J1.5@3166.19,2388.81 ccw(c3132.86,2422.14) 3180,2422.14 ; 3180,2422.14 ccw(c3227.14,2422.14) J1.5@3193.81,2388.81 ; 3180,2422.14 ccw(c3227.14,2422.14) J1.5@3193.81,2388.81 ; 3180,2422.14 ccw(c3227.14,2422.14) J1.5@3193.81,2388.81 ; 3180,2422.14 ccw(c3227.14,2422.14) J1.5@3193.81,2388.81 ; J2.5@3866.19,2388.81 ccw(c3832.86,2422.14) 3880,2422.14 ; J2.5@3866.19,2388.81 ccw(c3832.86,2422.14) 3880,2422.14 ; J2.5@3866.19,2388.81 ccw(c3832.86,2422.14) 3880,2422.14 ; J2.5@3866.19,2388.81 ccw(c3832.86,2422.14) 3880,2422.14 ; 3880,2422.14 ccw(c3927.14,2422.14) J2.5@3893.81,2388.81 ; 3880,2422.14 ccw(c3927.14,2422.14) J2.5@3893.81,2388.81 ; 3880,2422.14 ccw(c3927.14,2422.14) J2.5@3893.81,2388.81 ; 3880,2422.14 ccw(c3927.14,2422.14) J2.5@3893.81,2388.81
12.0V: C3.1 C5.1 K.2 K.5 R8.2 U3.13 U3.14 U3.24 U5.3 | length 3443.3
  Top Layer w20: R8.2@3180,2795 3180,2885 ; 3514.25,2885 U3.24@3514.25,2995.83 ; 3770.16,2914.84 U3.14@3770.16,2995.83 ; 3795.75,2920.75 U3.13@3795.75,2995.83 ; R8.2@3169.39,2805.61 ccw(c3143.79,2831.21) 3180,2831.21 ; R8.2@3169.39,2805.61 ccw(c3143.79,2831.21) 3180,2831.21 ; R8.2@3169.39,2805.61 ccw(c3143.79,2831.21) 3180,2831.21 ; 3180,2831.21 ccw(c3216.21,2831.21) R8.2@3190.61,2805.61 ; 3180,2831.21 ccw(c3216.21,2831.21) R8.2@3190.61,2805.61 ; 3180,2831.21 ccw(c3216.21,2831.21) R8.2@3190.61,2805.61
  Top Layer w50: U5.3@3184.45,4103.11 3033.11,4103.11 ; 3785,2930 3740,2885 3180,2885 3045,2885 K.5@2795,3135 K.2@2795,3375 2795,3475 2868.9,3548.9 C3.1@2868.9,3640 2868.9,3938.9 3033.11,4103.11 ; 2994.64,4064.64 cw(c3080,3979.29) C5.1@3080,4100 ; 2994.64,4064.64 cw(c3080,3979.29) C5.1@3080,4100 ; 2994.64,4064.64 cw(c3080,3979.29) C5.1@3080,4100 ; 2994.64,4064.64 cw(c3080,3979.29) C5.1@3080,4100 ; 3033.11,4103.11 cw(c3057.58,4078.64) C5.1@3080,4105 ; 3033.11,4103.11 cw(c3057.58,4078.64) C5.1@3080,4105 ; 3033.11,4103.11 cw(c3057.58,4078.64) C5.1@3080,4105 ; 3033.11,4103.11 cw(c3057.58,4078.64) C5.1@3080,4105
AC1: J1.3 U1.11 | length 1443.6
  Top Layer w12: v1(3445,3010) 3445,3315 3491.42,3361.42 U1.11@3545.55,3361.42
  Bottom Layer w12: J1.3@3380,2375 3380,2855 3445,2920 v1(3445,3010) ; J1.3@3363.36,2391.64 ccw(c3323.2,2431.8) 3380,2431.8 ; J1.3@3363.36,2391.64 ccw(c3323.2,2431.8) 3380,2431.8 ; J1.3@3363.36,2391.64 ccw(c3323.2,2431.8) 3380,2431.8 ; J1.3@3363.36,2391.64 ccw(c3323.2,2431.8) 3380,2431.8 ; 3380,2431.8 ccw(c3436.8,2431.8) J1.3@3396.64,2391.64 ; 3380,2431.8 ccw(c3436.8,2431.8) J1.3@3396.64,2391.64 ; 3380,2431.8 ccw(c3436.8,2431.8) J1.3@3396.64,2391.64 ; 3380,2431.8 ccw(c3436.8,2431.8) J1.3@3396.64,2391.64
AC2: J1.4 U1.10 | length 1513.7
  Top Layer w12: v1(3405,3010) 3405,3310 3476.1,3381.1 U1.10@3545.55,3381.1
  Bottom Layer w12: J1.4@3280,2375 3280,2815 3405,2940 v1(3405,3010) ; J1.4@3263.36,2391.64 ccw(c3223.2,2431.8) 3280,2431.8 ; J1.4@3263.36,2391.64 ccw(c3223.2,2431.8) 3280,2431.8 ; J1.4@3263.36,2391.64 ccw(c3223.2,2431.8) 3280,2431.8 ; J1.4@3263.36,2391.64 ccw(c3223.2,2431.8) 3280,2431.8 ; 3280,2431.8 ccw(c3336.8,2431.8) J1.4@3296.64,2391.64 ; 3280,2431.8 ccw(c3336.8,2431.8) J1.4@3296.64,2391.64 ; 3280,2431.8 ccw(c3336.8,2431.8) J1.4@3296.64,2391.64 ; 3280,2431.8 ccw(c3336.8,2431.8) J1.4@3296.64,2391.64
ADC: C20.1 R8.1 R9.2 U1.15 | length 2070
  Top Layer w12: R8.1@3270,2795 R9.2@3270,2695 C20.1@3380,2695 3380,2750 v1(3425,2795) ; v1(3475,3035) 3475,3140 3555,3220 3604.5,3220 3636.1,3251.6 U1.15@3636.1,3290.55 ; R9.2@3256.56,2708.44 ccw(c3224.13,2740.87) 3270,2740.87 ; R9.2@3256.56,2708.44 ccw(c3224.13,2740.87) 3270,2740.87 ; R9.2@3256.56,2708.44 ccw(c3224.13,2740.87) 3270,2740.87 ; R8.1@3256.56,2781.56 cw(c3224.13,2749.13) 3270,2749.13 ; R8.1@3256.56,2781.56 cw(c3224.13,2749.13) 3270,2749.13 ; R8.1@3256.56,2781.56 cw(c3224.13,2749.13) 3270,2749.13 ; 3270,2740.87 ccw(c3315.87,2740.87) R9.2@3283.44,2708.44 ; 3270,2740.87 ccw(c3315.87,2740.87) R9.2@3283.44,2708.44 ; 3270,2740.87 ccw(c3315.87,2740.87) R9.2@3283.44,2708.44 ; 3270,2749.13 cw(c3315.87,2749.13) R8.1@3283.44,2781.56 ; 3270,2749.13 cw(c3315.87,2749.13) R8.1@3283.44,2781.56 ; 3270,2749.13 cw(c3315.87,2749.13) R8.1@3283.44,2781.56 ; R9.2@3288.44,2681.56 cw(c3320.87,2649.13) 3320.87,2695 ; R9.2@3288.44,2681.56 cw(c3320.87,2649.13) 3320.87,2695 ; R9.2@3288.44,2681.56 cw(c3320.87,2649.13) 3320.87,2695 ; R9.2@3288.44,2708.44 ccw(c3320.87,2740.87) 3320.87,2695 ; R9.2@3288.44,2708.44 ccw(c3320.87,2740.87) 3320.87,2695 ; R9.2@3288.44,2708.44 ccw(c3320.87,2740.87) 3320.87,2695 ; 3334.13,2695 cw(c3334.13,2649.13) C20.1@3366.56,2681.56 ; 3334.13,2695 ccw(c3334.13,2740.87) C20.1@3366.56,2708.44 ; 3334.13,2695 cw(c3334.13,2649.13) C20.1@3366.56,2681.56 ; 3334.13,2695 ccw(c3334.13,2740.87) C20.1@3366.56,2708.44 ; 3334.13,2695 cw(c3334.13,2649.13) C20.1@3366.56,2681.56 ; 3334.13,2695 ccw(c3334.13,2740.87) C20.1@3366.56,2708.44 ; C20.1@3366.56,2713.44 ccw(c3334.13,2745.87) 3380,2745.87 ; C20.1@3366.56,2713.44 ccw(c3334.13,2745.87) 3380,2745.87 ; C20.1@3366.56,2713.44 ccw(c3334.13,2745.87) 3380,2745.87 ; 3380,2745.87 ccw(c3425.87,2745.87) C20.1@3393.44,2713.44 ; 3380,2745.87 ccw(c3425.87,2745.87) C20.1@3393.44,2713.44 ; 3380,2745.87 ccw(c3425.87,2745.87) C20.1@3393.44,2713.44 ; 3630.55,3246.05 ccw(c3615.97,3260.63) U1.15@3636.59,3260.63 ; 3630.55,3246.05 ccw(c3615.97,3260.63) U1.15@3636.59,3260.63 ; 3630.55,3246.05 ccw(c3615.97,3260.63) U1.15@3636.59,3260.63
  Bottom Layer w12: v1(3425,2795) 3425,2840 3475,2890 v1(3475,3035)
AIN1: U1.19 U3.21 | length 346
  Top Layer w12: U3.21@3591.02,2995.83 3591.02,3066.02 3714.84,3189.84 U1.19@3714.84,3290.55
AIN2: U1.18 U3.22 | length 348.5
  Top Layer w12: U3.22@3565.43,2995.83 3565.43,3075.43 3695.16,3205.16 U1.18@3695.16,3290.55
BATTERY: K.3 K.6 P3.1 | length 987.1
  Bottom Layer w50: K.3@2695,3375 2695,3355 2895,3155 K.6@2895,3135 P3.1@2895,2850 ; K.3@2700,3375 ccw(c2760.36,3375) 2717.68,3332.32 ; K.3@2700,3375 ccw(c2760.36,3375) 2717.68,3332.32 ; K.3@2700,3375 ccw(c2760.36,3375) 2717.68,3332.32 ; K.3@2700,3375 ccw(c2760.36,3375) 2717.68,3332.32 ; 2872.32,3177.68 cw(c2829.64,3135) K.6@2890,3135 ; 2872.32,3177.68 cw(c2829.64,3135) K.6@2890,3135 ; 2872.32,3177.68 cw(c2829.64,3135) K.6@2890,3135 ; 2872.32,3177.68 cw(c2829.64,3135) K.6@2890,3135
BC1: J2.3 U1.16 | length 1488.2
  Top Layer w12: v1(3607.5,3192.5) 3655.79,3240.79 U1.16@3655.79,3290.55
  Bottom Layer w12: v1(3607.5,3192.5) 4080,2720 J2.3@4080,2375 ; J2.3@4063.36,2391.64 ccw(c4023.2,2431.8) 4080,2431.8 ; J2.3@4063.36,2391.64 ccw(c4023.2,2431.8) 4080,2431.8 ; J2.3@4063.36,2391.64 ccw(c4023.2,2431.8) 4080,2431.8 ; J2.3@4063.36,2391.64 ccw(c4023.2,2431.8) 4080,2431.8 ; 4080,2431.8 ccw(c4136.8,2431.8) J2.3@4096.64,2391.64 ; 4080,2431.8 ccw(c4136.8,2431.8) J2.3@4096.64,2391.64 ; 4080,2431.8 ccw(c4136.8,2431.8) J2.3@4096.64,2391.64 ; 4080,2431.8 ccw(c4136.8,2431.8) J2.3@4096.64,2391.64
BC2: J2.4 U1.17 | length 1457
  Top Layer w12: v1(3605,3155) 3675.47,3225.47 U1.17@3675.47,3290.55
  Bottom Layer w12: v1(3605,3155) 3980,2780 J2.4@3980,2375 ; J2.4@3963.36,2391.64 ccw(c3923.2,2431.8) 3980,2431.8 ; J2.4@3963.36,2391.64 ccw(c3923.2,2431.8) 3980,2431.8 ; J2.4@3963.36,2391.64 ccw(c3923.2,2431.8) 3980,2431.8 ; J2.4@3963.36,2391.64 ccw(c3923.2,2431.8) 3980,2431.8 ; 3980,2431.8 ccw(c4036.8,2431.8) J2.4@3996.64,2391.64 ; 3980,2431.8 ccw(c4036.8,2431.8) J2.4@3996.64,2391.64 ; 3980,2431.8 ccw(c4036.8,2431.8) J2.4@3996.64,2391.64 ; 3980,2431.8 ccw(c4036.8,2431.8) J2.4@3996.64,2391.64